# Altium PCB STM32F4Dash.PcbDoc
Units mm, origin at the board's own origin, x right, y up, seen from the top; angles counter-clockwise.
Board outline 91.33 x 91.05 mm, 2 copper layers (Top Layer, Bottom Layer); 42 components, 39 nets, 232 pads, 64 vias.
Unrouted connection lines stored in the file: 1.
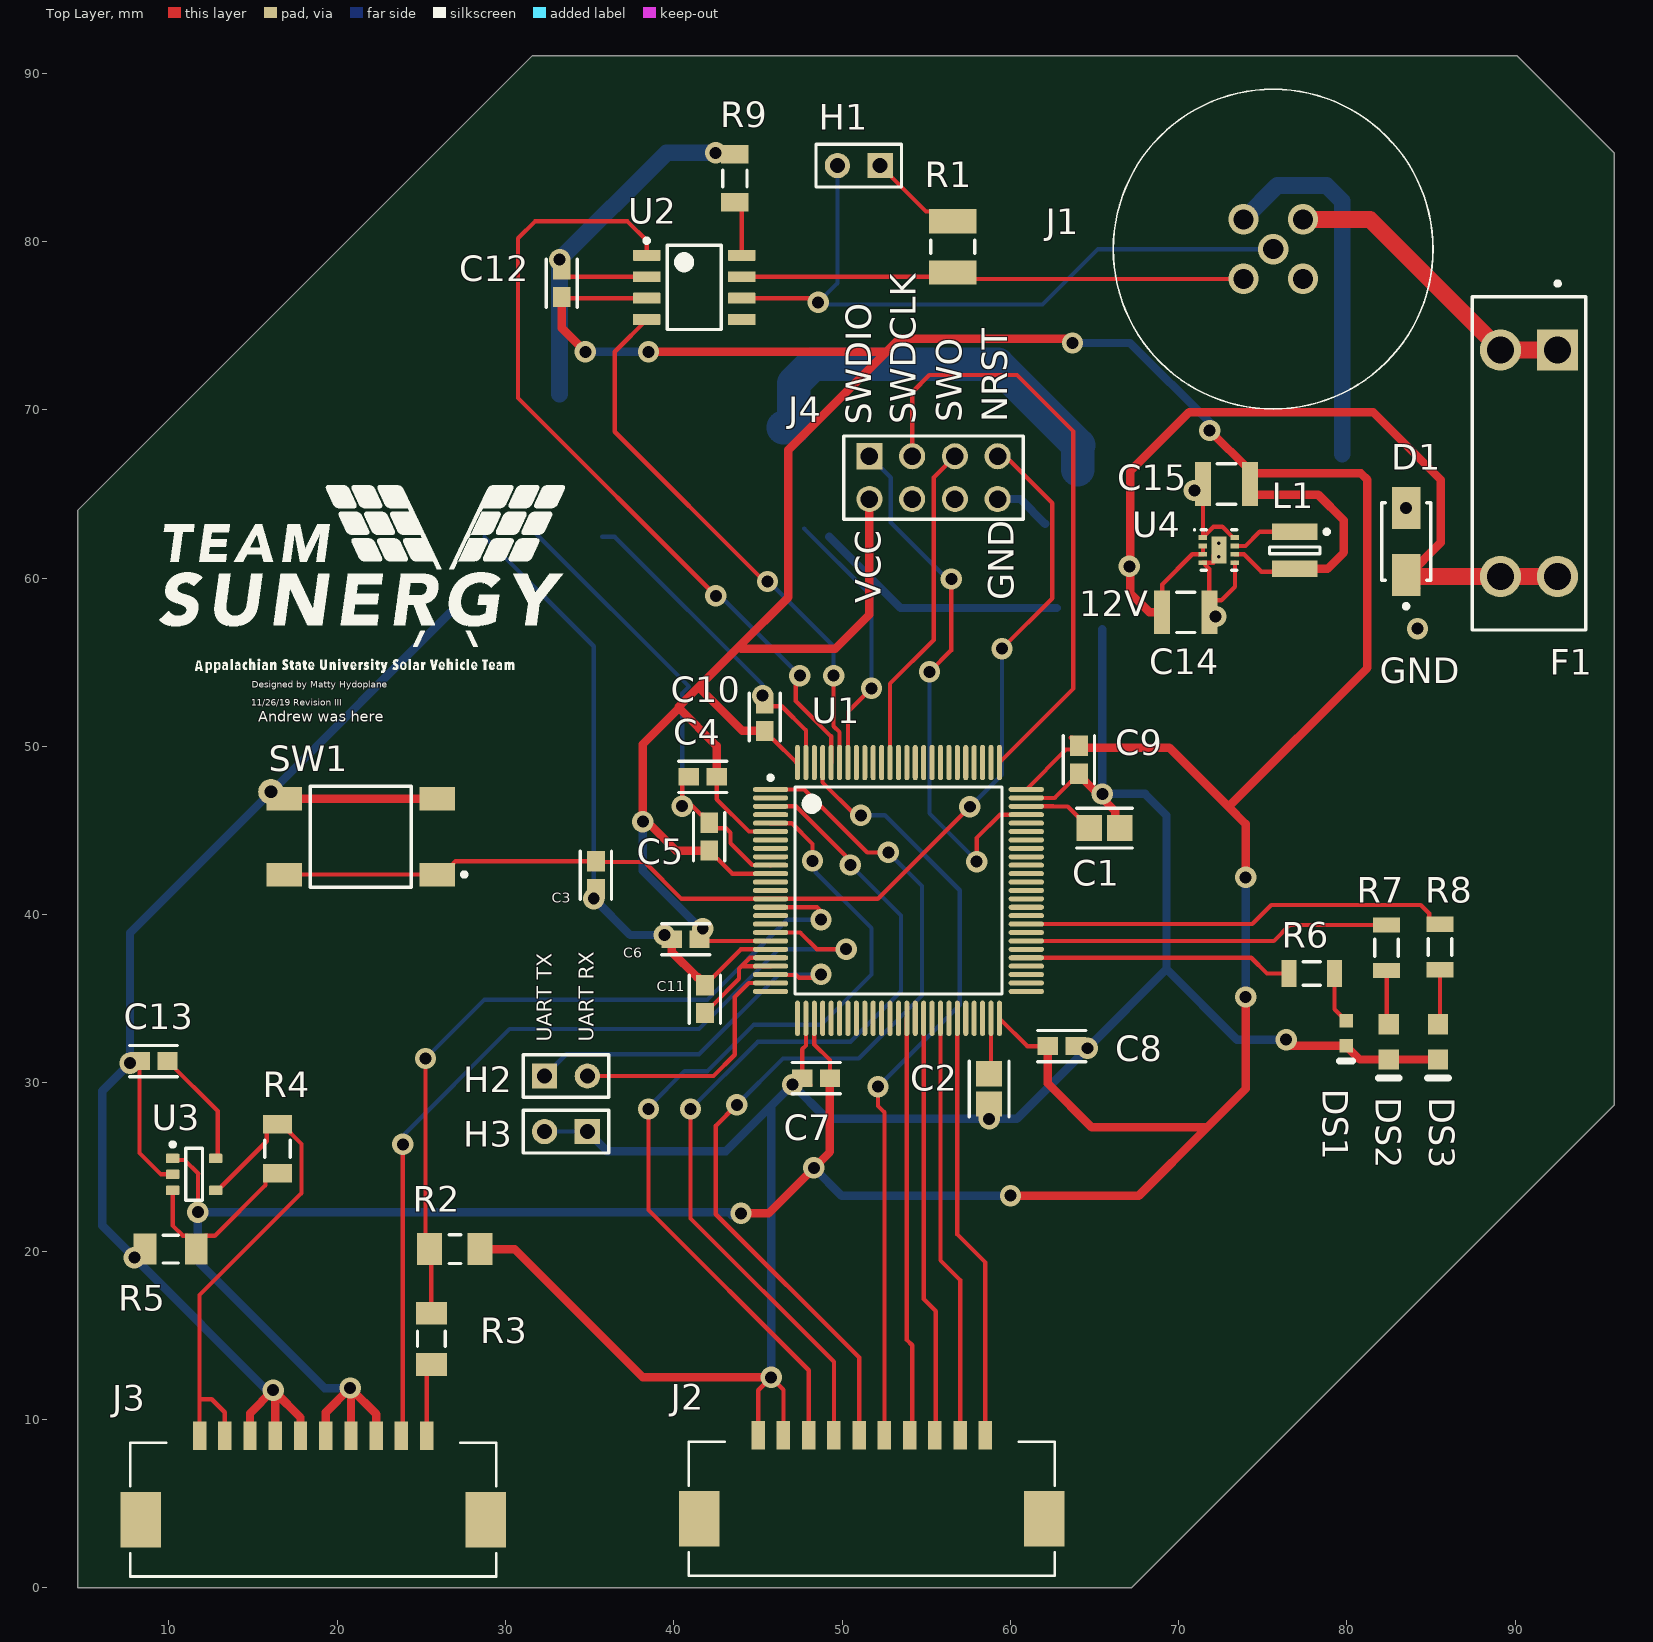
[diagram p0: Top Layer view]
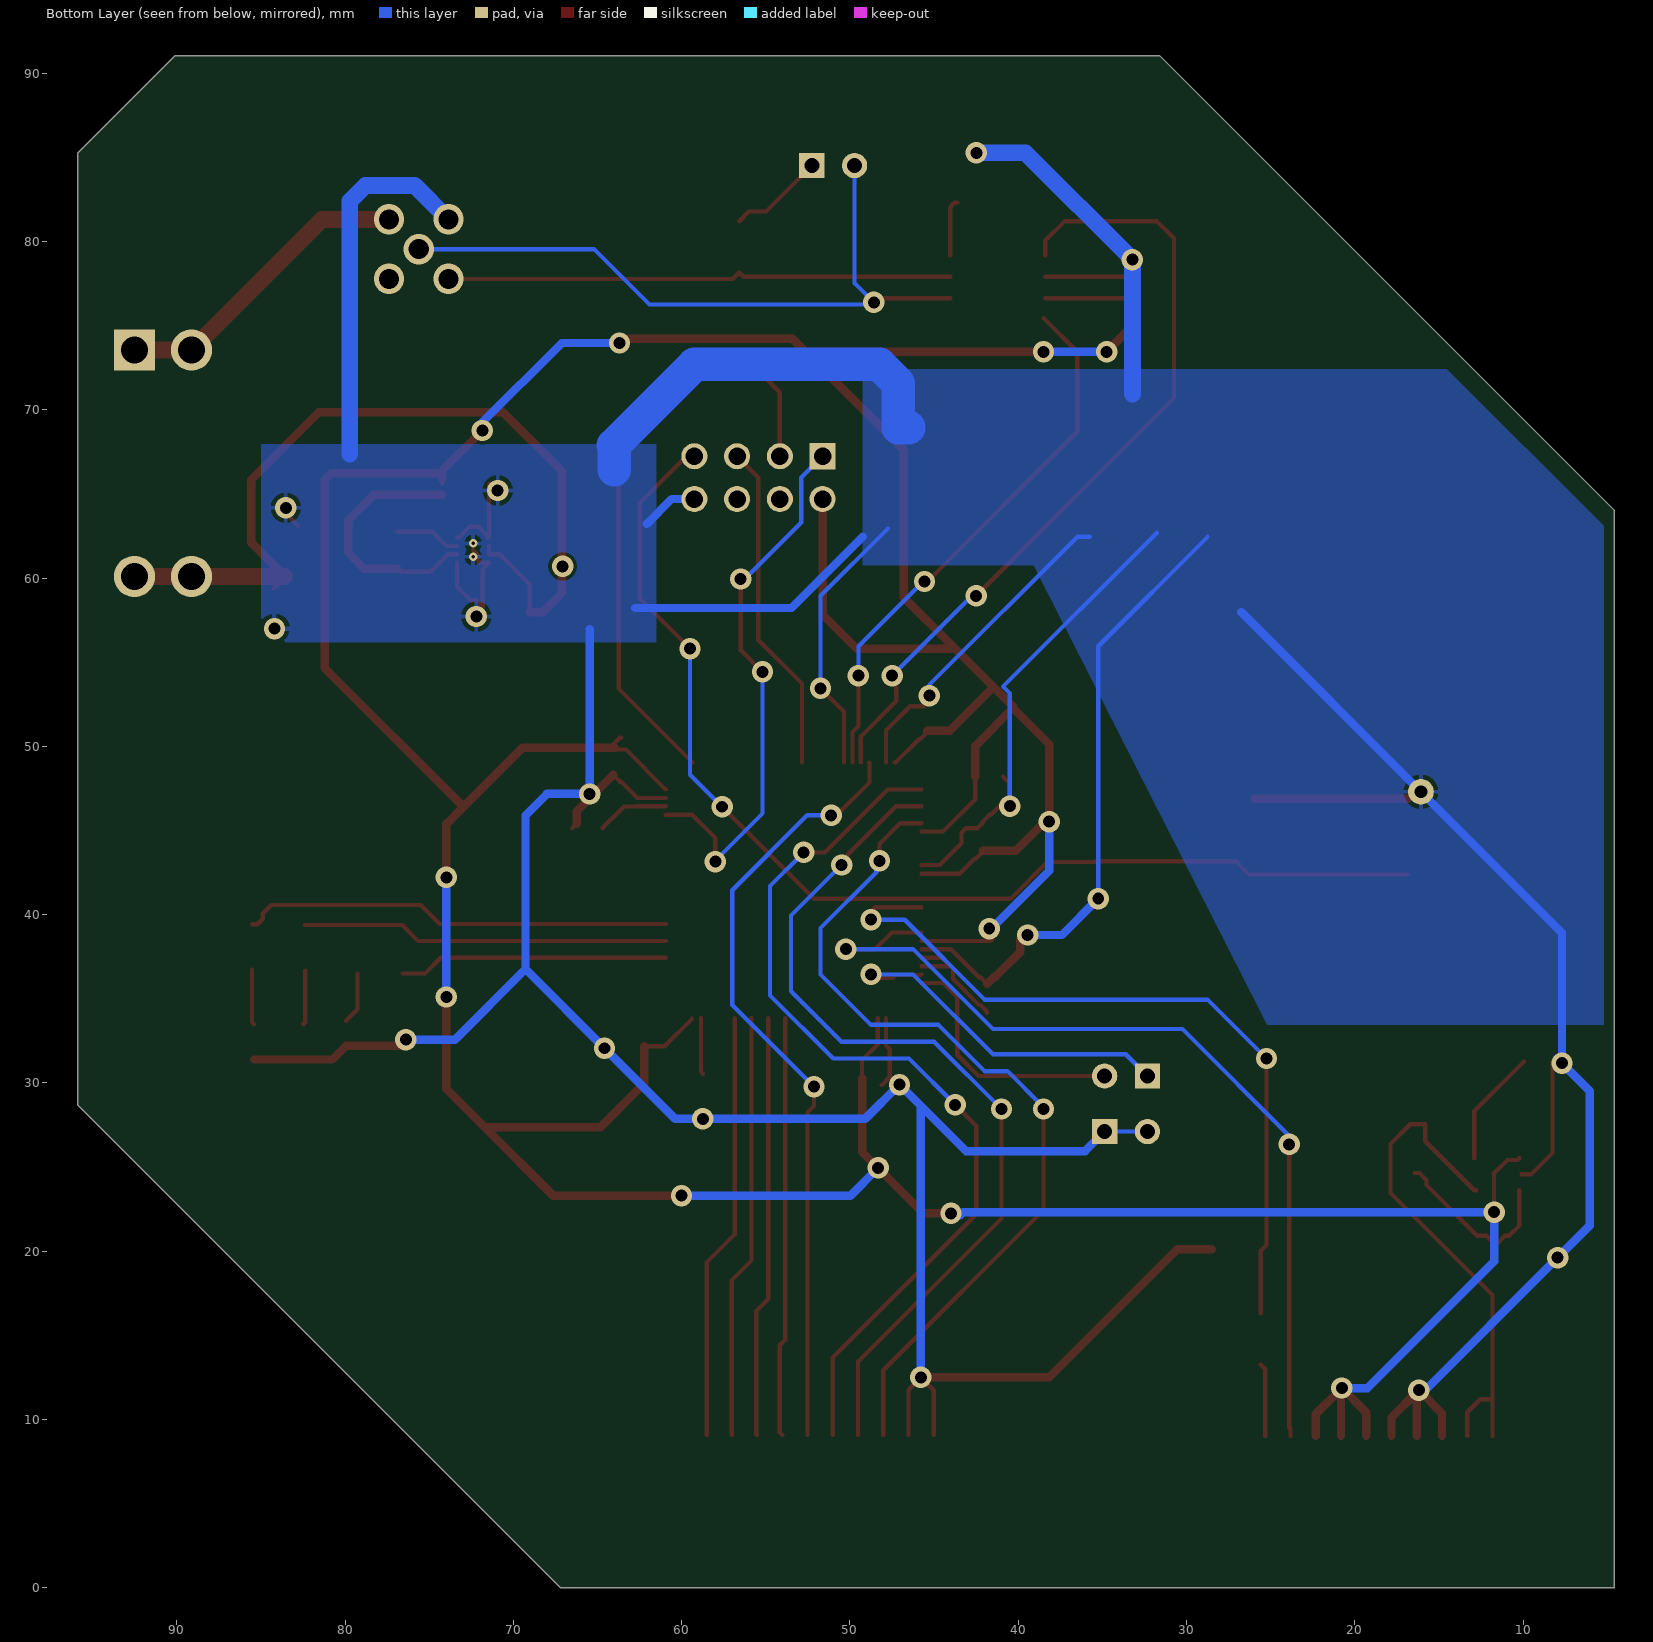
[diagram p1: Bottom Layer view, seen from below]

## Layer stack, top to bottom
Top Solder: solder mask 0.0102, Solder Resist, Dk 3.5
Top Layer: signal copper 0.0356
Dielectric 1: dielectric 0.32, FR-4, Dk 4.8
Bottom Layer: signal copper 0.0356
Bottom Solder: solder mask 0.0102, Solder Resist, Dk 3.5

## Board outline
4.575,0 67.2,0 95.9,28.7 95.9,85.25 90.1,91.05 31.6,91.05 4.575,64.025

## Design rules (kind name [scope] priority, off if disabled: settings)
Clearance [All] p1: gap=0.2 ignorepadtopadclearanceinfootprint=FALSE except(0: Arc-Hole Track-Hole SMDPad-Hole THPad-Hole Via-Hole Fill-Hole Poly-Hole Region-Hole Text-Hole)
MinimumSolderMaskSliver MinimumSolderMaskSliver_1 [HasFootprint('DSG8-1600X900TP') vs HasFootprint('DSG8-1600X900TP')] p1: minsoldermaskwidth=0
MinimumSolderMaskSliver [All] p2: minsoldermaskwidth=0.254
PolygonConnect [All] p1: connectstyle=Relief reliefconductorwidth=0.254 reliefentries=4 polygonreliefangle="90 Angle" airgapwidth=0.254
RoutingVias [All] p1: holewidth=0.711 width=1.27 viastyle="Through Hole" minholewidth=0.711 minwidth=1.27 maxholewidth=0.711 maxwidth=1.27
SilkToSolderMaskClearance SilkToSolderMaskClearance_1 [HasFootprint('DSG8-1600X900TP') vs HasFootprint('DSG8-1600X900TP')] p1: minsilkscreentomaskgap=0 clearancetoexposedcopper=TRUE
SilkToSolderMaskClearance [IsPad] p2: minsilkscreentomaskgap=0.254 clearancetoexposedcopper=TRUE
SolderMaskExpansion [All] p1: expansion=0.102
Width Width_1 [InNetClass('Power')] p1: maxlimit=5 minlimit=0.254 preferedwidth=1 minimp=50.000000 maximp=50.000000 favimp=50.000000
Width [All] p2: maxlimit=2 minlimit=0.2 preferedwidth=0.254 toplayer_maxwidth=1.5 minimp=50.000000 maximp=50.000000 favimp=50.000000
28 further rules are at their usual default settings.

## Classes and differential pairs
net class Power: +12 GND
component class User_LEDs: DS1 DS2 DS3 R6 R7 R8
component class Power_Supply: C14 C15 L1 U4
component class MCU: C1 C2 C3 C4 C5 C6 C7 C8 C9 C10 C11 SW1 U1
component class IO: C13 J2 J3 R2 R3 R4 R5 U3
component class Communications: C12 D1 F1 H1 H2 H3 J1 J4 R1 R9 U2

## Components (designator, comment, footprint, x,y, rotation, side; value= is the part's Value field where it differs from the comment)
C1 "2.2uF" Yageo_CC0805-0.85_IPC_A 65.601,45.142 r180 top
C2 "2.2uF" Yageo_CC0805-0.85_IPC_A 58.743,29.648 r90 top
C3 "100nF" Kemet_C0603_IPC_A 35.375,42.348 r270 top
C4 "100nF" Kemet_C0603_IPC_A 41.725,48.19 r0 top
C5 "100nF" Kemet_C0603_IPC_A 42.106,44.634 r270 top
C6 "100nF" Kemet_C0603_IPC_A 40.709,38.538 r0 top
C7 "100nF" Kemet_C0603_IPC_A 48.456,30.283 r0 top
C8 "100nF" Kemet_C0603_IPC_A 63.061,32.188 r0 top
C9 "100nF" Kemet_C0603_IPC_A 64.077,49.206 r270 top
C10 "100nF" Kemet_C0603_IPC_A 45.408,51.746 r90 top
C11 "100nF" Kemet_C0603_IPC_A 41.852,34.982 r270 top
C12 "100nF" Kemet_C0603_IPC_A 33.343,77.527 r90 top
C13 "100nF" Kemet_C0603_IPC_A 9.086,31.299 r0 top
C14 "CAP 22uF 16V X7R 1210(3225)" CAPC1210(3225)280_L 70.427,57.969 r180 top value=22uF
C15 "CAP 22uF 16V X7R 1210(3225)" CAPC1210(3225)280_L 72.84,65.589 r0 top value=22uF
D1 "S1J-13-F" Diodes_SMA_0 83.525,62.175 r90 top
DS1 "HSMS-C190" AVAG-HSMX-C190_V 79.952,32.95 r270 top
DS2 "HSMD-C170" AVAG-HSMX-C170_V 82.492,32.442 r270 top
DS3 "HSMG-C170" AVAG-HSMX-C170_V 85.413,32.442 r270 top
F1 "3557-2" Keystone_3557-2_0 90.825,66.825 r270 top
H1 "Header 0" HDR1X2 52.266,84.512 r180 top
H2 "Header 0" HDR1X2 32.327,30.41 r0 top
H3 "Header 0" HDR1X2 34.867,27.108 r180 top
J1 "1542761" 1542761 75.624,79.549 r135 top
J2 "Part Number: 1-292227-0" CON10_1X10_DRH_H 58.52,9.074 r180 top value=Value
J3 "Part Number: 1-292227-0" CON10_1X10_DRH_H 25.321,9.025 r180 top value=Value
J4 "SSW-104-02-T-D" SMTC-SSW-104-02-X-D 51.63,67.24 r0 top
L1 "SRN3015-2R2M" BOUR-SRN3015-2_V 76.904,61.652 r270 top
R1 "ERJ-14YJ121U" RESC3225X70X50ML20T20 56.584,79.686 r90 top
R2 "ERA8AEB912V" RESC3216X70X50ML20T25 26.993,20.123 r180 top
R3 "4.7 kOhm" RESC3216X60X45ML15T20 25.596,14.789 r90 top
R4 "CRCW1206523RFKEA" RESC3216X60X45NL10T20 16.452,26.092 r270 top
R5 "CRCW12061K00FKEA" RESC3216X60X45ML15T20 10.102,20.123 r180 top
R6 "CRCW120656R0FKEA" RESC3216X60X45LL10T20 77.92,36.506 r180 top
R7 "CRCW120656R0FKEA" RESC3216X60X45LL10T20 82.365,38.03 r90 top
R8 "CRCW120656R0FKEA" RESC3216X60X45LL10T20 85.54,38.077 r90 top
R9 "ERJ-8GEYJ103V" RESC3216X70X50NL05T20 43.63,83.75 r90 top
SW1 "TL3301AF260QG" ESWI-TL3301AF260QG_V 21.405,44.634 r180 top
U1 "STM32F407VGT6" STM-LQFP100_M 53.354,41.439 r0 top
U2 "SN65HVD230D" D0008A_M 41.217,77.273 r0 top
U3 "LM321MFX" DBV0005A_L 11.499,24.568 r0 top
U4 "TPS62172DSGR" DSG8-1600X900TP 72.398,61.664 r0 top

## Footprints (in the part's own frame and the unit in brackets; to place one, negate y for a bottom-side part, rotate by r counter-clockwise, add the part's x,y. Pads: shape width x height; smd on the part's side, far side on the other; paste and mask are expansions set on the pad)
1542761 [mm]
  round 1.8 hole 1.2: 1(-2.5,0) 2(0,-2.5) 3(2.5,0) 4(0,2.5) 5(0,0)
  silkscreen extent -9.5,-9.5 9.5,9.5
AVAG-HSMX-C170_V [mm] "SMD, 2-Leads, Body 2x1.25mm, Height 0.8mm"
  rect 1.2x1.2 smd: 1(-1.05,0) 2(1.05,0)
  silkscreen extent 2.15,-0.63 2.15,0.63, body extent -1,-0.63 1,0.63, height 0.8
AVAG-HSMX-C190_V [mm] "SMD, 2-Leads, Body 1.6x0.8mm, Height 0.9mm"
  rect 0.8x0.8 smd: 1(-0.75,0) 2(0.75,0)
  silkscreen extent 1.65,-0.4 1.65,0.4, body extent -0.8,-0.4 0.8,0.4, height 0.9
BOUR-SRN3015-2_V [mm] "SMD, 2-Leads, Body 3x3mm, Height 1.5mm"
  rect 1x2.7 smd: 1(-1.1,0) 2(1.1,0)
  silkscreen extent -1.22,-1.5 0.2,2.03, body extent -1.5,-1.5 1.5,1.5, height 1.5
CAPC1210(3225)280_L [mm] "Chip Capacitor, Body 3.2x2.5mm, Height 2.8mm, IPC High Density"
  rect 0.95x2.6 smd: 1(-1.4,0) 2(1.4,0)
  silkscreen extent -0.55,-1.2 0.55,1.2, body extent -1.7,-1.4 1.7,1.4, height 2.8
CON10_1X10_DRH_H [mm]
  rect 0.8x1.7 smd: 1(0,0) 2(1.5,0) 3(3,0) 4(4.5,0) 5(6,0) 6(7.5,0) 7(9,0) 8(10.5,0) 9(12,0) 10(13.5,0)
  rect 2.413x3.302 smd: 11(-3.499,4.978) 12(16.999,4.978)
  silkscreen extent -4.12,0.41 17.62,8.36, body extent 0,0 0.25,0.25, height 0.25
D0008A_M [mm] "SOIC, 8-Leads, Body 5x4mm, Pitch 1.27mm, IPC Low Density"
  rrect15% 1.65x0.65 smd: 1(-2.825,1.905) 2(-2.825,0.635) 3(-2.825,-0.635) 4(-2.825,-1.905) 5(2.825,-1.905) 6(2.825,-0.635) 7(2.825,0.635) 8(2.825,1.905)
  silkscreen extent -2.95,-2.5 1.6,2.9, body extent -3,-2.45 3,2.45, height 1.63
DBV0005A_L [mm] "SOT23, 5-Leads, Body 3.05x1.75mm, Pitch 0.95mm, IPC High Density"
  rrect18% 0.8x0.55 smd: 1(-1.275,0.95) 2(-1.275,0) 3(-1.275,-0.95) 4(1.275,-0.95) 5(1.275,0.95)
  silkscreen extent -1.4,-1.55 0.5,1.9, body extent -1.42,-1.46 1.42,1.46, height 1.08
Diodes_SMA_0 [mm]
  rect 2.5x1.7 smd paste+0 mask+0: 1(-2,0) 2(2,0)
  silkscreen extent -3.97,-1.46 2.3,1.46, body extent -3.35,-1.56 3.35,1.56, height 0.25
DSG8-1600X900TP [mm] "SON, 8-Leads, Body 2x2mm, Pitch 0.5mm, Thermal Pad 1.6x0.9mm, TI Recommended"
  rect 0.5x0.28 smd paste-0.14 mask+0.07: 1(-0.95,0.75) 2(-0.95,0.25) 3(-0.95,-0.25) 4(-0.95,-0.75) 5(0.95,-0.75) 6(0.95,-0.25) 7(0.95,0.25) 8(0.95,0.75)
  rect 0.9x1.6 smd paste-0.45 mask+0.07: 9(0,0)
  silkscreen extent -1.5,-1.2 1.05,1.25, body extent -1.05,-1.05 1.05,1.05, height 0.8
ESWI-TL3301AF260QG_V [mm] "SMD, 4-Leads, Body 6x6mm"
  rect 2.1x1.4 smd: 1(-4.55,2.25) 2(4.55,2.25) 3(-4.55,-2.25) 4(4.55,-2.25)
  silkscreen extent -6.27,-3 3,3, body extent -3,-3 3,3, height 5.3
HDR1X2 [mm] "Connector; Header; 2 Position"
  rect 1.5x1.5 hole 0.9: 1(0,0)
  round 1.5 hole 0.9: 2(2.54,0)
  silkscreen extent -1.27,-1.27 3.81,1.27
Kemet_C0603_IPC_A [mm]
  rect 1.206x1.058 smd paste+0 mask+0: 1(-0.826,0) 2(0.826,0)
  silkscreen extent -1.43,-0.93 1.43,0.93
Keystone_3557-2_0 [mm]
  rect 2.45x2.45 hole 1.6 paste-1000 mask+0: 1(-6.735,1.7)
  round 2.45 hole 1.6 paste-1000 mask+0: 2(6.735,1.7) 3(-6.735,-1.7) 4(6.735,-1.7)
  silkscreen extent -10.8,-3.36 9.9,3.36, body extent -10.08,-3.54 10.08,3.54, height 0.25
RESC3216X60X45LL10T20 [mm] "Chip Resistor, 2-Leads, Body 3.20x1.60mm, IPC High Density"
  rect 0.9x1.6 smd: 1(-1.35,0) 2(1.35,0)
  silkscreen extent -0.5,-0.7 0.5,0.7, body extent -1.65,-0.85 1.65,0.85, height 0.6
RESC3216X60X45ML15T20 [mm] "Chip Resistor, 2-Leads, Body 3.3x1.75mm, IPC Low Density"
  rect 1.35x1.85 smd: 1(-1.525,0) 2(1.525,0)
  silkscreen extent -0.45,-0.82 0.45,0.82, body extent -1.65,-0.87 1.65,0.87, height 0.6
RESC3216X60X45NL10T20 [mm] "Chip Resistor, 2-Leads, Body 3.20x1.60mm, IPC Medium Density"
  rect 1.1x1.7 smd: 1(-1.45,0) 2(1.45,0)
  silkscreen extent -0.5,-0.75 0.5,0.75, body extent -1.65,-0.85 1.65,0.85, height 0.6
RESC3216X70X50ML20T25 [mm] "Chip Resistor, 2-Leads, Body 3.20x1.60mm, IPC Low Density"
  rect 1.5x1.9 smd: 1(-1.5,0) 2(1.5,0)
  silkscreen extent -0.35,-0.85 0.35,0.85, body extent -1.7,-0.9 1.7,0.9, height 0.7
RESC3216X70X50NL05T20 [mm] "Chip Resistor, 2-Leads, Body 3.20x1.60mm, IPC Medium Density"
  rect 1.1x1.65 smd: 1(-1.425,0) 2(1.425,0)
  silkscreen extent -0.5,-0.72 0.5,0.72, body extent -1.63,-0.82 1.62,0.82, height 0.7
RESC3225X70X50ML20T20 [mm] "Chip Resistor, 2-Leads, Body 3.20x2.50mm, IPC Low Density"
  rect 1.45x2.8 smd: 1(-1.525,0) 2(1.525,0)
  silkscreen extent -0.4,-1.3 0.4,1.3, body extent -1.7,-1.35 1.7,1.35, height 0.7
SMTC-SSW-104-02-X-D [mm] "SQ Post Socket, 2x4 Pins, Vertical, 2.54mm Pitch, Female"
  rect 1.55x1.55 hole 1.04: 1(0,0)
  round 1.55 hole 1.04: 2(0,-2.54) 3(2.54,0) 4(2.54,-2.54) 5(5.08,0) 6(5.08,-2.54) 7(7.62,0) 8(7.62,-2.54)
  silkscreen extent -1.53,-3.74 9.15,1.2, body extent -1.52,-3.75 9.14,1.21, height 8.51
STM-LQFP100_M [mm] "Thin QFP, 100-Leads, Body 14x14mm, Pitch 0.5mm, IPC Low Density"
  oval 2.1x0.3 smd: 1(-7.6,6) 2(-7.6,5.5) 3(-7.6,5) 4(-7.6,4.5) 5(-7.6,4) 6(-7.6,3.5) 7(-7.6,3) 8(-7.6,2.5) 9(-7.6,2) 10(-7.6,1.5) 11(-7.6,1) 12(-7.6,0.5) 13(-7.6,0) 14(-7.6,-0.5) 15(-7.6,-1) 16(-7.6,-1.5) 17(-7.6,-2) 18(-7.6,-2.5) 19(-7.6,-3) 20(-7.6,-3.5) 21(-7.6,-4) 22(-7.6,-4.5) 23(-7.6,-5) 24(-7.6,-5.5) 25(-7.6,-6) 51(7.6,-6) 52(7.6,-5.5) 53(7.6,-5) 54(7.6,-4.5) 55(7.6,-4) 56(7.6,-3.5) 57(7.6,-3) 58(7.6,-2.5) 59(7.6,-2) 60(7.6,-1.5) 61(7.6,-1) 62(7.6,-0.5) 63(7.6,0) 64(7.6,0.5) 65(7.6,1) 66(7.6,1.5) 67(7.6,2) 68(7.6,2.5) 69(7.6,3) 70(7.6,3.5) 71(7.6,4) 72(7.6,4.5) 73(7.6,5) 74(7.6,5.5) 75(7.6,6)
  oval 0.3x2.1 smd: 26(-6,-7.6) 27(-5.5,-7.6) 28(-5,-7.6) 29(-4.5,-7.6) 30(-4,-7.6) 31(-3.5,-7.6) 32(-3,-7.6) 33(-2.5,-7.6) 34(-2,-7.6) 35(-1.5,-7.6) 36(-1,-7.6) 37(-0.5,-7.6) 38(0,-7.6) 39(0.5,-7.6) 40(1,-7.6) 41(1.5,-7.6) 42(2,-7.6) 43(2.5,-7.6) 44(3,-7.6) 45(3.5,-7.6) 46(4,-7.6) 47(4.5,-7.6) 48(5,-7.6) 49(5.5,-7.6) 50(6,-7.6) 76(6,7.6) 77(5.5,7.6) 78(5,7.6) 79(4.5,7.6) 80(4,7.6) 81(3.5,7.6) 82(3,7.6) 83(2.5,7.6) 84(2,7.6) 85(1.5,7.6) 86(1,7.6) 87(0.5,7.6) 88(0,7.6) 89(-0.5,7.6) 90(-1,7.6) 91(-1.5,7.6) 92(-2,7.6) 93(-2.5,7.6) 94(-3,7.6) 95(-3.5,7.6) 96(-4,7.6) 97(-4.5,7.6) 98(-5,7.6) 99(-5.5,7.6) 100(-6,7.6)
  silkscreen extent -7.72,-6.15 6.15,6.82, body extent -7,-7 7,7, height 1.6
Yageo_CC0805-0.85_IPC_A [mm]
  rect 1.505x1.556 smd paste+0 mask+0: 1(-0.901,0) 2(0.901,0)
  silkscreen extent -1.65,-1.18 1.65,1.18, body extent -2.15,-1.28 2.15,1.28, height 0.25

## Part data
C1 C2: library part CC0805KKX7R6BB225, "2.2UF CC0805KKX7R6BB225"
C3 C4 C5 C6 C7 C8 C9 C10 C11 C12 C13: library part C0603C104K5RACTU, "CAP CER 0.1UF 100NF 50V X7R 0603 C0603C104K5RACTU"
C14 C15: library part CMP-1038-02277-1, "CAP 22uF 16V ±10% 1210 (3225 Metric) Thickness 2.8mm SMD", Case-EIA=1210, Case-Metric=3225, Rated Voltage="16 V", Tolerance=±10%, Max Thickness="2.8 mm", Technology=SMT
DS1: library part CMP-2000-06427-1, "LED Uni-Color Red, 52 mW, 20 mA, -40 to 85 degC, 2-Pin SMD, RoHS, Tape and Reel", Emitting Color=Red, Forward Current=25mA, Forward Voltage=2.6V, Manufacturer=Avago, Operating Temperature Classification=Industrial, Operating Temp Range=-40Cto85C, Package Description="2-Pin Surface Mount Device, Body 1.6 x 0.8 mm, Height 0.9 mm", Package Reference=HSMX-C190, Package Type=ChipLed, Power Dissipation=52W, Reverse Voltage=5V, Test Current (It)=20mA, Chip Material=GaP, Datasheet URL=http://docs.avagotech.com/docs/AV02-0551EN, Datasheet Version=03/2012, DELETED=Compliant, Dominant Wave Length=626nm, High Brightness=No, Lens Dimensions=1x0.8x0.5mm, Lens Type=ColorlessDiffused, Luminous Intensity=10mcd, Lum Intensity=10mcd, Main Category=ChipLED, Manufacturer URL=http://www.avagotech.com/, Mounting=SurfaceMount, Mounting Technology=SurfaceMount, Number of  Elements=1, Packaging=TapeandReel, Peak Wavelength=630nm, Pin Count=2, Product Depth (mm)=0.8mm, Product Height (mm)=0.8mm, Product Length (mm)=1.6mm, Rad Hardened=No, Shape Type=Rectangular, Type=Uni-Color, Viewing Angle=170deg
DS2: library part CMP-2000-06421-1, "LED Uni-Color Orange, 52 mW, 20 mA, -40 to 85 degC, 2-Pin SMD, RoHS, Tape and Reel", Forward Current If=20mA, Forward Voltage=2.2V, LED Colour=Orange, Manufacturer=Avago, Operating Temperature Max=85°C, Operating Temperature Min=-30°C, Operating Temperature Range=-30°Cto+85°C, Opto Case Style=SMD, Package Description="2-Pin Surface Mount Device, Body 2 x 1.25 mm, Height 0.8 mm", Package Reference=HSMX-C170, Power Dissipation Pd=52mW, Storage Temperature Min=-40°C, Bulb Size=1.25mmx1.4mm, Datasheet URL=http://docs.avagotech.com/docs/AV02-0551EN, Datasheet Version=03/2012, Dominant Wavelength=604nm, External Depth=0.8mm, External Length / Height=2mm, External Width=1.25mm, Forward Current If Max=20mA, Forward Voltage VF Max=2.2V, LED Mounting=SMD, LED Type=Standard, Lens Shape=Rectangular, Light Area Height=1.25mm, Luminous Intensity=8mcd, Luminous Intensity Typ=8mcd, Manufacturer URL=http://www.avagotech.com/, Mounting Technology=SurfaceMount, Mounting Type=SMD, MSL=MSL2A-4weeks, No. of Pins=2, Opto Mounting Orientation=Top, Package / Case=SMD, Peak Forward Current=20mA, Peak Wavelength=605nm, PIV Max=5V, Storage Temperature Max=85°C, SVHC=NoSVHC(19-Dec-2012), Viewing Angle=170°, Voltage Vf Typ=2.2V, Wavelength Typ=605nm
DS3: library part CMP-2000-05062-1, "Chip LED, Green, 2.2 V, -40 to 85 degC, 2-Pin SMD, Pb-Free, Tape and Reel", Forward Current If=20mA, Forward Voltage=2.2V, Forward Voltage VF Max=2.6V, LED Colour=Green, Manufacturer=Avago, Operating Temperature Max=85degC, Operating Temperature Min=-30degC, Operating Temperature Range=-30degCto+85degC, Opto Case Style=SMD, Package Description="2-Pin Surface Mount Device, Body 2 x 1.25 mm, Height 0.8 mm", Package Reference=HSMX-C170, Storage Temperature Min=-40degC, Bulb Size=1.25mmx1.4mm, Datasheet URL=https://datasheet.ciiva.com/29280/180495-da-01-en-chip-led-hsmg-c170-gelb-gruen-29280971.pdf, Datasheet Version=Oct-08, Dominant Wavelength=572nm, Dominant Wavelength Typ=572nm, External Depth=0.8mm, External Length / Height=2mm, External Width=1.25mm, Forward Current If Max=20mA, LED Mounting=SMD, LED Type=Standard, Lens Shape=Rectangular, Light Area Height=1mm, Luminous Intensity=15mcd, Luminous Intensity Min=4mcd, Luminous Intensity Typ=15mcd, Manufacturer URL=http://www.avagotech.com/, Mounting Type=SMD, MSL=MSL2A-4weeks, No. of Pins=2, Opto Mounting Orientation=Top, Packaging=CutTape, Peak Forward Current=20mA, Peak Wavelength=570nm, PIV Max=5V, Storage Temperature Max=85degC, SVHC=NoSVHC(16-Jun-2014), Viewing Angle=170deg, Voltage Vf Typ=2.2V, Wavelength Typ=570nm
H1 H2 H3: library part "Header 2", "Header, 2-Pin", LatestRevisionDate=17-Jul-2002, LatestRevisionNote="Re-released for DXP Platform.", Publisher="Altium Limited"
J1: "Connector", Manufacturer_Name="Phoenix Contact", Mouser Part Number=651-1542761, RS Part Number=8025583, Allied_Number=70170366, Allied Price/Stock=https://www.alliedelec.com/phoenixcontact-1542761/70170366/, Datasheet Link=https://media.digikey.com/PDF/Data%20Sheets/Phoenix%20Contact%20PDFs/1542761.pdf, Height=18mm, Manufacturer_Part_Number=1542761, Mouser Price/Stock=https://www.mouser.com/Search/Refine.aspx?Keyword=651-1542761, RS Price/Stock=http://uk.rs-online.com/web/p/products/8025583
J2 J3: library part 1-292227-0, "No Description Available", Built_By=EMA_UL_Team, Copyright="Copyright (C) 2018 Accelerated Designs. All rights reserved", Manufacturer_Part_Number=1-292227-0, RefDes=RefDes, Type=DEV, Vendor="TE Connectivity"
J4: library part CMP-1023-00342-1, "SQ Post Socket, Through-hole, Vertical, -55 to 105 degC, 2.54mm Pitch, 8-Pin, Female, RoHS", Manufacturer=Samtec, Temperature Range="-55 to 105 degC", ComponentLink1Description="Manufacturer URL", ComponentLink1URL=http://www.samtec.com, ComponentLink2Description=Datasheet, ComponentLink2URL=http://www.samtec.com/documents/webfiles/pdf/SSW_TH.PDF, ComponentLink3Description="Package Specification", ComponentLink3URL=http://www.samtec.com/documents/webfiles/cpdf/SSW-1XX-XX-XXX-X-XX-XXX-XX-MKT.pdf, DatasheetVersion=F-214, Mounting Technology=Through-hole, Orientation=Vertical, PackageDescription="Assembly, Socket Strip .016 X .031 Tail", PackageReference=SSW-104-02-X-D, PackageVersion="CA, 6/1987", PartNumber=SSW-104-02-T-D, Pitch="2.54 mm", RoHS=True
L1: library part CMP-0007-00003-1, "Semi-shielded Power Inductor, 2.2 uH, +/- 20%, 1.8 A, -40 to 125 degC, 3 x 3 x 1.5 mm SMD, RoHS and Halogen Free, Tape and Reel", Inductance="2.2 uH", Inductance tolerance="+/- 20%", Manufacturer=Bourns, Operating Temperature="-40 to 125 degC", Rated Current="1.8 A", Resistance to Solder Heat="+260 degC for 10 sec.", ComponentLink1Description="Manufacturer URL", ComponentLink1URL=http://www.bourns.com/, ComponentLink2Description=Datasheet, ComponentLink2URL=http://www.bourns.com/data/global/pdfs/SRN3015.pdf, ComponentLink3Description="Package Specification", ComponentLink3URL=http://www.bourns.com/data/global/pdfs/SRN3015.pdf, DatasheetVersion=Aug-11, DCR Max="0.072 Ohm", Isat="1.65 A", Mounting Technology="Surface Mount", PackageDescription="2-Pin SMD, Body 3 x 3 mm, Height 1.5 mm", PackageReference=SRN3015, Packing="Tape and Reel", PartNumber=SRN3015-2R2M, RoHS=TRUE, SRF Min="90 MHz"
R1: library part CMP-2005-03490-1, "120Ohm", Manufacturer=Panasonic, Part Number=ERJ-14YJ121U
R2: library part CMP-2003-00013-1, Manufacturer=Panasonic, Part Number=ERA8AEB912V
R3: library part CMP-2100-03618-1, "Chip Resistor, 4.7 KOhm, +/- 1%, 0.25 W, -55 to 155 degC, 1206 (3216 Metric), RoHS, Tape and Reel", Case/Package=1206, Case Code (Metric)=3216, Manufacturer="Vishay Semiconductor", Max Operating Temperature=155degC, Max Power Dissipation=250mW, Min Operating Temperature=-55degC, Package Description="2-Pin Surface Mount Device, Body 3.15 x 1.6 mm", Package Quantity=10, Package Reference=1206.0, Resistance=4.7KOhm, Temperature Coefficient=100ppm/degreesC, Tolerance=1%, Voltage Rating=200V, Case Code (Imperial)=1206, Composition=ThickFilm, Contact Plating=Tin, Datasheet URL=http://www.vishay.com/docs/20035/dcrcwe3.pdf, Datasheet Version=41061.0, Depth=1.6mm, Height=0.55mm, Lead Free=LeadFree, Length=3.2mm, Manufacturer URL=http://www.vishay.com/, Military Standard=Not, Mount=SurfaceMount, Number of Terminations=2, Packaging=TapeandReel, Power Rating=250mW, Radiation Hardening=No, REACH SVHC=Unknown, RoHSCompliant=true, Termination=SMD/SMT, Voltage Rating (DC)=200V, Weight=0.000353oz, Width=1.6mm
R4: library part CMP-2003-02266-1, Manufacturer="Vishay Dale", Part Number=CRCW1206523RFKEA
R5: library part CMP-2100-03616-1, "Chip Resistor, 1 KOhm, +/- 1%, 0.25 W, -55 to 155 degC, 1206 (3216 Metric), RoHS, Tape and Reel", Case/Package=1206, Case Code (Metric)=3216, Manufacturer="Vishay Semiconductor", Max Operating Temperature=155degC, Max Power Dissipation=250mW, Min Operating Temperature=-55degC, Package Description="2-Pin Surface Mount Device, Body 3.15 x 1.6 mm", Package Quantity=10, Package Reference=1206.0, Resistance=1KOhm, Temperature Coefficient=100ppm/degreesC, Tolerance=1%, Voltage Rating=200V, Case Code (Imperial)=1206, Composition=ThickFilm, Contact Plating=Tin, Datasheet URL=http://www.farnell.com/datasheets/1720486.pdf, Datasheet Version=41061.0, Depth=1.6mm, Height=0.55mm, Lead Free=LeadFree, Length=3.2mm, Manufacturer URL=http://www.vishay.com/, Military Standard=Not, Mount=SurfaceMount, Number of Pins=2, Number of Terminations=2, Packaging=TapeandReel, Power Rating=250mW, Radiation Hardening=No, REACH SVHC=Unknown, RoHSCompliant=true, Termination=SMD/SMT, Voltage Rating (DC)=200V, Weight=0.000353oz, Width=0.063inch
R6 R7 R8: library part CMP-2003-02285-1, Manufacturer="Vishay Dale", Part Number=CRCW120656R0FKEA
R9: library part CMP-2003-00545-1, "10k", Manufacturer=Panasonic, Part Number=ERJ-8GEYJ103V
SW1: library part CMP-2000-07249-1, "Tactile Switch, SPST-NO, 50 mA, 12 V, -20 to 70 degC, 4-Pin SMD, RoHS, Tape and Reel", Contact Rating @ Voltage=0.05A@12VDC, Illumination Type, Color=-, Manufacturer=E-Switch, Operating Force=260gf, Operating Temperature=-20°C~70°C, Package Description="4-Pin Surface Mount Device, Body 6 x 6 mm", Package Version="Rev. D, 10/2014", Standard Package=1, 3D Model=TL3301AFyyyyG.stp, Actuator Height off PCB, from Pins=5.00mm, Actuator Material=Polyamide(PA),Nylon, Actuator Orientation=TopActuated, Actuator Type=Standard, Catalog Drawings=TL3301xFFootprint, Category=Switches, Circuit=SPST-NO, Datasheet URL=https://www.e-switch.com/system/asset/product_line/data_sheet/185/TL3301.pdf, Datasheet Version=12/2013, Family=TactileSwitches, Featured Product=TL3301SeriesTactSwitch, Features=-, Illumination=Non-Illuminated, Illumination Voltage (Nominal)=-, Ingress Protection=-, Manufacturer URL=http://www.e-switch.ch/en/, Mechanical Life=100,000Cycles, Mounting Technology=SurfaceMount, Mounting Type=SurfaceMount, Online Catalog=TL3301Series, Other Names=EG2527DKR, Outline=6.00mmx6.00mm, Package Reference=TL3301AF260QG, Package URL=http://spec_sheets.e-switch.com/specs/P010513.pdf, Packaging=Digi-Reel®, Product Training Modules=SwitchBasics, RoHS Information=TL3301SeriesRoHSCertofCompliance, Series=TL3301, Switch Function=Off-Mom, Switch Travel=0.25mm, Termination Style=GullWing
U1: library part CMP-0243-00017-3, "ARM Cortex-M4 32-bit MCU+FPU, 210 DMIPS, 1024 kB Flash, 192 kB Internal RAM, 82 I/Os, 100-pin LQFP, -40 to 85 degC, Tray", I/Os (High Current)=82, Manufacturer=STMicroelectronics, Operating Frequency(F) (Processor speed) (MHz)=168, Supply Voltage(Vcc) max (V)=3.6, Supply Voltage(Vcc) min (V)=1.8, ComponentLink1Description="Manufacturer URL", ComponentLink1URL=http://www.st.com/web/en/home.html, ComponentLink2Description=Datasheet, ComponentLink2URL=http://www.st.com/st-web-ui/static/active/en/resource/technical/document/datasheet/DM00037051.pdf, ComponentLink3Description="Package Specification", ComponentLink3URL=http://www.st.com/st-web-ui/static/active/en/resource/technical/document/data_brief/DM00071938.pdf, Core="ARM Cortex-M4", D/A Converter=2x12-bit, DatasheetVersion="Rev. 4", FLASH Size (Prog) (kB)=1024, Internal RAM Size (kB)=192, Mounting Technology="Surface Mount", PackageDescription="100-Pin Low Profile Quad Flat Package, 14 x 14 mm Body, 0.5 mm Pitch", PackageReference=LQFP100, PackageVersion="Rev. 1, 06/2013", Packing=Tray, PartNumber=STM32F407VGT6
U2: library part CMP-0315-00046-3, "CAN Bus Transceiver, 3.3 V, -40 to 85 degC, 8-Pin SOIC (D), Green (RoHS & no Sb/Br), Tube", Generic Part Number=SN65HVD230, Supply Voltage Max="3.6 V", Supply Voltage Min="3 V", Temperature Max="85 degC", Temperature Min="-40 degC", ComponentLink1Description="Manufacturer URL", ComponentLink1URL=http://www.ti.com/, ComponentLink2Description=Datasheet, ComponentLink2URL="http://www.ti.com/general/docs/lit/getliterature.tsp?genericGeneric Part Number=SN65HVD230&fileType=pdf", DatasheetVersion=SLOS346N, Mounting Technology="Surface Mount", PackageDescription="8-Pin Plastic Small Outline, Body 4.9 x 3.9 mm, Pitch 1.27 mm", Packing=Tube, PartNumber=SN65HVD230D, RoHS=TRUE
U3: library part CMP-0055-01337-3, "Low Power Single Op Amp, 5-pin SOT-23", Manufacturer="Texas Instruments", Package Reference=DBV0005A, PackageTopMarking=A63A*XTT, PowerWise=N, ComponentLink1Description="Datasheet URL", ComponentLink1URL=http://www.ti.com/general/docs/lit/getliterature.tsp?genericPartNumber=LM321&fileType=pdf, CompType=Amplifiers, PackageDescription="Molded SOT-23, .115 x .063 x .040 in Body, 5 Lead, .0375 in Pitch", PinCount=5, RoHS=N
U4: "Buck Step Down Regulator with 3 to 17 V Input and 3.3 V Output, -40 to 85 degC, 8-Pin WSON (DSG), Green (RoHS & no Sb/Br)", Manufacturer="Texas Instruments", Rating=Catalog, Switch Current Limit(Typ)(A)=1.05, Code_JEDEC=MO-229, ComponentLink1Description=Datasheet, ComponentLink1URL=http://www.ti.com/general/docs/lit/getliterature.tsp?genericPartNumber=TPS62172&fileType=pdf, ComponentLink2Description="Package Specification", ComponentLink2URL=http://www.ti.com/litv/pdf/mpds308a, ComponentLink3Description="URL Link1", ComponentLink3URL="Samples URL:http://www.ti.com/product/tps62172#samples", DatasheetVersion=SLVSAT8A, Duty Cycle(Max)(%)=100, Eco-Plan="Green (RoHS & no Sb/Br)", Iout(Max)(A)=0.5, Iq(Typ)(mA)=0.017, Mounting Technology="Surface Mount", PackageDescription="8-Pin Plastic Small Outline No-Lead, 2 x 2 x 0.8 mm Body, 0.5 mm Pitch, Exposed Pad", PackageReference=DSG8-1600X900TP, PackageVersion="revB, Oct-2010", PartNumber=TPS62172DSGR, Preset Vout(V)=3.3, Regulated Outputs(#)=1, SubFamily="Step-Down Regulator", Synchronous Rectification=TRUE, Topology=Buck, Vin(Max)(V)=17, Vin(Min)(V)=3, Vout(Max)(V)=3.3, Vout(Min)(V)=3.3

## Free pads (board coordinates)
  round 1.524 hole 0.762: 2(16.071,47.301)

## Via types
v1: diameter 1.27, hole 0.711, Top Layer to Bottom Layer, 57 vias
v2: diameter 1.8, hole 1.2, Top Layer to Bottom Layer, 5 vias
v3: diameter 0.5, hole 0.2, Top Layer to Bottom Layer, 2 vias

## Nets (pads, with @x,y where several pads share a name; then routed paths per layer and width w, separated by ;. In a path a pad name is that pad's centre, name@x,y a point inside that pad or via, vN(x,y) a via of type N, cw(c..) or ccw(c..) an arc to the next point about the centre after c; other vN are vias at no path point)
+12: C14.2 D1.1 F1.2 F1.4 U4.2 U4.3 | length 53.3
  Top Layer w0.254: C14.2 69.027,59.624 70.817,61.414 U4.3 ; U4.3@71.448,61.435 U4.2 ; D1.1@83.61,60.09 83.588,60.113 D1.1 83.525,60.124 83.562,60.087 D1.1@84.248,59.401
  Top Layer w0.5: C14.2 68.268,57.969 67.125,59.112 67.125,66.35 70.635,69.86 81.565,69.86 85.575,65.85 85.575,62.1 83.588,60.113 83.562,60.087 D1.1@83.475,60
  Top Layer w1: D1.1@83.61,60.09 F1.4 F1.2
  other v1: 67.075,60.7
GND: C1.1 C2.1 C3.2 C4.1 C5.1 C6.1 C7.1 C8.2 C9.2 C10.2 C11.1 C12.2 C13.1 C14.1 C15.1 D1.2 DS1.2 DS2.2 DS3.2 H3.1 H3.2 J1.3 J2.9 J2.10 J3.6 J3.7 J3.8 J4.8 pad.2 R2.1 R5.2 R9.2 SW1.3 SW1.4 U1.10 U1.20 U1.27 U1.74 U1.94 U1.99 U2.2 U3.2 U4.1 U4.4 U4.5 U4.8 U4.9 | length 434.9
  Top Layer w0.254: C13.1 8.26,25.84 9.532,24.568 U3.2@10.099,24.568 ; v1(16.198,11.741) v1@16.321,11.618 ; C12.2 33.343,78.31 33.745,77.908 U2.2 ; C4.1 40.5,47.791 v1(40.5,46.45) 40.616,46.45 40.866,46.7 41.63,45.936 41.704,45.936 42.106,45.534 C5.1 42.424,45.142 43.1,45.142 43.376,44.866 43.376,44.242 44.671,42.948 45.745,42.948 U1.10 ; C11.1@41.376,36.284 C11.1@41.45,36.284 ; C11.1 41.852,35.882 42.254,36.284 42.328,36.284 43.983,37.939 U1.20 ; J2.10 45.02,11.734 v1(45.789,12.503) 46.52,11.772 J2.9 ; C10.2 45.599,52.381 46.424,52.381 47.854,50.951 U1.99 ; U1.27 47.854,32.221 47.63,31.997 C7.1 47.704,30.283 C7.1@48.106,29.881 ; U1.94 50.354,52.054 v1(51.75,53.45) ; U1.74 62.636,46.939 63.601,47.904 63.675,47.904 C9.2@64.077,48.306 ; C1.1@66.231,45.413 C1.1 ; C15.1 71.448,65.581 U4.1 71.558,62.414 71.571,62.427 71.571,62.537 72.083,63.049 72.603,63.049 73.238,62.414 U4.8 ; U4.4 U4.4@71.558,60.914 ; U4.9 72.079,61.345 72.079,60.914 U4.4@71.558,60.914 ; U4.5 73.348,59.49 72.534,58.676 72.175,58.676 71.827,58.328 71.827,60.535 71.571,60.791 71.571,60.901 U4.4@71.558,60.914 ; v2(73.856,81.317) J1.3@74.274,81.317 ; v1@76.291,32.2 75.922,32.569 v1(76.396,32.569) ; D1.2@82.802,63.11 83.525,63.833 v1(83.525,64.175)
  Top Layer w0.5: J3.8 14.821,10.364 v1(16.198,11.741) ; J3.7 16.321,11.618 17.821,10.118 J3.6 ; SW1.4 SW1.3 ; R2.1 30.549,20.123 38.169,12.503 v1(45.789,12.503) ; C6.1 39.883,37.777 C11.1@41.376,36.284 ; C11.1@41.45,36.284 C11.1@41.852,35.882 ; C9.2@64.077,48.306 66.231,46.152 C1.1@66.231,45.413 ; v1@76.291,32.2 DS1.2 80.76,31.392 DS2.2 DS3.2
  Bottom Layer w0.254: 28.75,62.45 35.248,55.952 v1(35.248,40.951) ; 31.75,62.7 40.899,53.551 40.5,53.152 v1(40.5,46.45) ; H3.2 H3.1 ; 35.75,62.45 36.5,62.45 45.281,53.669 v1(45.281,53.016) ; 47.75,62.95 51.75,58.95 v1(51.75,53.45)
  Bottom Layer w0.5: v1@16.007,11.551 v1(7.943,19.615) 6.038,21.52 6.038,29.521 v1(7.689,31.172) 7.689,38.919 pad.2 26.75,57.98 ; H3.1 36.025,25.95 43.107,25.95 45.789,28.632 ; v1(35.248,40.951) 37.407,38.792 v1(39.439,38.792) ; v1(45.789,12.503) 45.789,28.632 ; 49.25,62.45 53.477,58.223 62.75,58.223 ; J4.8 60.6,64.7 62.075,63.225 ; 65.474,56.95 v1(65.474,47.174) 68.014,47.174 69.284,45.904 69.284,36.76 ; v1(76.396,32.569) 73.475,32.569 69.284,36.76 ; 45.789,28.632 v1(47.059,29.902) 49.091,27.87 v1(58.743,27.87) 60.394,27.87 v1(64.585,32.061) 69.284,36.76
  Bottom Layer w1: 33.216,70.923 v1(33.216,78.924) 39.566,85.274 v1(42.487,85.274) ; v2(73.856,81.317) 75.864,83.325 78.8,83.325 79.725,82.4 79.725,67.375
  Bottom Layer w2: 46.5,68.95 47.125,68.95 47.125,71.575 48.25,72.7 59.25,72.7 64.063,67.888 64,67.825 64,66.45
  other v1: 84.2,57 72.205,57.715 70.935,65.208
  other v3: 72.398,61.264 72.398,62.064
NetC1_2: C1.2 U1.73 | length 4.3
  Top Layer w0.254: U1.73 62.546,46.439 62.554,46.431 63.411,46.431 64.049,45.793 64.075,45.793 64.7,45.168 C1.2
NetC2_2: C2.2 U1.49 | length 3.3
  Top Layer w0.254: C2.2 58.854,30.66 U1.49
NetC3_1: C3.1 J4.7 SW1.1 SW1.2 U1.14 | length 68.8
  Top Layer w0.254: SW1.2 SW1.1 26.305,42.384 26.878,42.957 26.878,43.025 27.027,43.174 C3.1 35.375,43.131 38.275,43.131 40.467,40.939 U1.14 52.127,40.939 v1(57.6,46.412) ; J4.7 59.71,67.24 62.5,64.45 62.5,58.805 v1(59.505,55.81)
  Bottom Layer w0.254: v1(57.6,46.412) 59.505,48.317 v1(59.505,55.81)
NetC13_2: C13.2 U3.5 | length 7
  Top Layer w0.254: C13.2@9.95,31.275 12.899,28.326 U3.5@12.899,25.518
NetDS1_1: DS1.1 R6.1 | length 3.1
  Top Layer w0.254: R6.1 79.27,34.382 DS1.1
NetDS2_1: DS2.1 R7.1 | length 3.2
  Top Layer w0.254: R7.1 82.365,33.619 DS2.1
NetDS3_1: DS3.1 R8.1 | length 3.3
  Top Layer w0.254: DS3.1 85.54,33.619 R8.1
NetF1_1: F1.1 F1.3 J1.2 | length 18.3
  Top Layer w1: v2(77.392,81.317) 81.368,81.317 F1.3 F1.1
NetH1_1: H1.1 R1.2 | length 5.7
  Top Layer w0.254: H1.1 54.998,81.78 56.015,81.78 R1.2
NetH1_2: H1.2 J1.5 U2.6 | length 41.7
  Top Layer w0.254: U2.6 48.329,76.638 v1(48.583,76.384)
  Bottom Layer w0.254: H1.2 49.726,77.527 v1(48.583,76.384) 48.71,76.257 61.918,76.257 65.21,79.549 v2(75.624,79.549)
NetH2_1: H2.1 U1.23 | length 22.2
  Top Layer w0.254: U1.23 45.777,36.416 47.276,36.416 47.44,36.252 48.698,36.252 48.75,36.304 v1(48.75,36.45)
  Bottom Layer w0.254: H2.1 33.617,31.7 41.5,31.7 46.25,36.45 v1(48.75,36.45)
NetH2_2: H2.2 U1.24 | length 15.2
  Top Layer w0.254: H2.2 42.36,30.41 43.63,31.68 43.63,35.109 44.46,35.939 U1.24
NetJ1_4: J1.4 R1.1 U2.7 | length 30.1
  Top Layer w0.254: U2.7 56.331,77.908 R1.1 56.964,77.781 v2(73.856,77.781)
NetJ2_1: J2.1 U1.45 | length 25.5
  Top Layer w0.254: U1.45 56.854,20.996 58.52,19.33 J2.1
NetJ2_2: J2.2 U1.43 | length 25.2
  Top Layer w0.254: U1.43 55.854,19.456 57.02,18.29 J2.2
NetJ2_3: J2.3 U1.41 | length 25.1
  Top Layer w0.254: U1.41 54.854,17.154 55.568,16.44 55.568,9.122 J2.3
NetJ2_4: J2.4 U1.39 | length 25
  Top Layer w0.254: U1.39 53.854,14.725 54.171,14.408 54.171,9.225 J2.4
NetJ2_5: J2.5 U1.97 | length 46.5
  Top Layer w0.254: U1.97 48.845,49.03 48.845,48.098 48.837,48.089 48.837,47.863 50.796,45.904 v1(51.123,45.904) ; v1(52.139,29.775) 52.139,28.632 52.52,28.251 J2.5
  Bottom Layer w0.254: v1(51.123,45.904) 52.546,45.904 57,41.45 57,34.636 v1(52.139,29.775)
NetJ2_6: J2.6 U1.1 | length 55.2
  Top Layer w0.254: v1(43.75,28.7) 42.5,27.45 42.5,22.2 51.02,13.68 J2.6 ; U1.1 47.761,47.439 51.5,43.7 v1(52.75,43.7)
  Bottom Layer w0.254: v1(43.75,28.7) 46.5,31.45 51,31.45 54.75,35.2 54.75,41.7 v1(52.75,43.7)
NetJ2_7: J2.7 U1.3 | length 53.4
  Top Layer w0.254: v1(41,28.45) 41,21.95 49.52,13.43 J2.7 ; U1.3 47.261,46.439 50.5,43.2 v1(50.5,42.95)
  Bottom Layer w0.254: v1(41,28.45) 45,32.45 50.5,32.45 53.5,35.45 53.5,39.95 v1(50.5,42.95)
NetJ2_8: J2.8 U1.5 | length 51.7
  Top Layer w0.254: v1(38.5,28.45) 38.5,22.45 48.02,12.93 J2.8 ; U1.5 47.011,45.439 48.25,44.2 v1@48.25,43.45
  Bottom Layer w0.254: v1@38.574,28.626 40.649,30.7 42,30.7 44.75,33.45 48.75,33.45 51.75,36.45 51.75,39.2 48.444,42.506 48.444,43.006 v1(48.25,43.2)
NetJ3_1: J3.1 R3.1 | length 4.4
  Top Layer w0.254: J3.1 25.321,12.989 R3.1
NetJ3_2: J3.2 U1.18 | length 53.9
  Top Layer w0.254: J3.2 23.821,9.446 23.9,9.525 v1(23.9,26.35) ; U1.18 47.511,38.939 48.5,37.95 v1(50.25,37.95)
  Bottom Layer w0.254: v1(23.9,26.35) 23.9,26.45 23.7,26.65 30.25,33.2 41.5,33.2 46.25,37.95 v1(50.25,37.95)
NetJ3_9: J3.9 J3.10 R4.1 U3.4 | length 30.9
  Top Layer w0.254: J3.10 11.821,11.2 ; U3.4 12.899,23.618 15.817,26.536 15.817,27.542 R4.1 16.708,27.542 17.875,26.375 17.875,23.451 11.821,17.397 11.821,11.2 ; J3.9 13.321,10.429 12.55,11.2 11.821,11.2
NetJ4_1: J4.1 U1.72 | length 32.9
  Top Layer w0.254: v1(55.199,54.425) 56.487,55.713 56.5,55.7 v1(56.5,59.95) ; v1(58,43.15) 58,44.55 59.389,45.939 U1.72
  Bottom Layer w0.254: J4.1 52.9,65.97 52.9,63.3 56.25,59.95 v1(56.5,59.95) ; v1(55.199,54.425) 55.199,46.019 58,43.218 v1(58,43.15)
NetJ4_3: J4.3 U1.76 | length 36.7
  Top Layer w0.254: J4.3 54.17,71.049 55.187,72.066 60.394,72.066 63.75,68.71 63.75,53.435 U1.76
NetJ4_5: J4.5 U1.89 | length 19.8
  Top Layer w0.254: U1.89 52.854,53.729 55.45,56.325 55.45,65.98 J4.5
NetL1_1: L1.1 U4.7 | length 3.9
  Top Layer w0.254: U4.7 73.979,61.914 74.817,62.752 L1.1
NetR2_2: R2.2 R3.2 U1.15 | length 45.8
  Top Layer w0.254: v1(25.25,31.45) 25.25,20.366 R2.2 25.596,20.02 R3.2 ; U1.15 48.511,40.439 48.75,40.2 v1(48.75,39.7)
  Bottom Layer w0.254: v1(25.25,31.45) 28.75,34.95 42,34.95 46.75,39.7 v1(48.75,39.7)
NetR4_2: R4.2 R5.1 U3.3 | length 11
  Top Layer w0.254: U3.3 10.224,21.526 10.829,20.921 11.079,20.921 R5.1@11.627,20.373 ; R5.1 R5.1@11.627,20.373 ; R4.2 16.16,24.642 15.737,24.219 15.737,23.927 12.731,20.921 12.175,20.921 R5.1@11.627,20.373
NetR6_2: R6.2 U1.55 | length 16
  Top Layer w0.254: U1.55 74.32,37.439 75.253,36.506 R6.2
NetR7_2: R7.2 U1.57 | length 21.8
  Top Layer w0.254: U1.57 75.662,38.439 76.603,39.38 R7.2
NetR8_2: R8.2 U1.59 | length 25.7
  Top Layer w0.254: U1.59 74.376,39.439 75.507,40.57 84.397,40.57 84.9,40.067 84.9,39.75 85.223,39.427 R8.2
NetR9_1: R9.1 U2.8 | length 3.4
  Top Layer w0.254: R9.1 cw(c43.63,81.913) 44.042,81.913 U2.8
NetU1_95: U1.95 U2.4 | length 32.8
  Top Layer w0.254: U2.4@38.5,75.45 36.5,73.45 36.5,68.7 45.4,59.8 v1(45.575,59.8) ; v1@49.5,53.95 49.5,51.2 49.854,50.846 U1.95
  Bottom Layer w0.254: v1(45.575,59.8) 45.575,59.875 49.5,55.95 v1(49.5,54.2)
NetU1_96: U1.96 U2.1 | length 48.3
  Top Layer w0.254: U2.1 38.392,80.058 37.25,81.2 31.75,81.2 30.75,80.2 30.75,70.7 v1(42.5,58.95) ; v1@47.25,53.95 47.25,52.7 49.354,50.596 U1.96
  Bottom Layer w0.254: v1(42.5,58.95) 42.75,58.95 v1(47.5,54.2)
VCC_MCU: C4.2 C5.2 C6.2 C7.2 C8.1 C9.1 C10.1 C11.2 C12.1 C15.2 J3.3 J3.4 J3.5 J4.2 L1.2 U1.6 U1.11 U1.19 U1.21 U1.22 U1.28 U1.50 U1.75 U1.100 U2.3 U3.1 U4.6 | length 348
  Top Layer w0.254: U3.1 10.317,25.425 10.925,25.425 11.75,24.6 11.725,24.575 v1(11.725,22.325) ; v1(20.77,11.868) v1@20.821,11.817 ; C12.1 33.406,76.638 U2.3 ; v1(38.169,45.523) v1@38.169,45.777 ; 40.306,52.276 40.306,52.359 ; C6.2 41.634,38.439 U1.19 ; C11.2 41.852,34.23 42.254,34.632 42.328,34.632 43.884,36.188 43.884,36.79 44.033,36.939 ; C5.2 42.106,43.734 42.508,43.332 42.582,43.332 43.475,42.439 44.675,42.439 U1.11 ; C4.2 42.551,46.856 44.468,44.939 U1.6 ; 43.884,55.937 44.011,55.81 ; C10.1 45.408,50.846 45.81,50.444 45.884,50.444 47.289,49.039 U1.100 ; U1.22 44.033,36.939 ; U1.21 44.533,37.439 44.033,36.939 ; U1.28 48.354,32.29 49.282,31.362 C7.2 ; U1.50@59.385,33.808 61.005,32.188 C8.1 ; U1.75 60.954,47.447 63.316,49.809 63.854,49.809 C9.1@63.965,49.92 ; C9.1@63.601,50.508 63.675,50.508 64.077,50.106 C9.1 ; U4.6 73.889,61.414 74.921,60.382 76.734,60.382 L1.2 ; C15.2 74.24,65.876 C15.2@74.588,66.224
  Top Layer w0.5: J3.5 19.321,10.419 v1(20.77,11.868) ; J3.4 20.821,11.817 22.321,10.317 J3.3 ; C12.1 33.343,74.857 v1(34.75,73.45) ; v1(38.5,73.45) 52.5,73.45 ; 40.306,52.359 41.471,53.524 ; C5.2 40.138,43.808 38.169,45.777 38.169,50.139 40.306,52.276 42.551,50.031 C4.2 ; v1(44,22.25) 45.63,22.25 v1(48.329,24.949) 49.282,25.902 C7.2 ; 44.011,55.81 49.61,55.81 51.63,57.83 J4.2 ; C10.1 44.075,50.92 41.471,53.524 ; v1(60.013,23.298) 67.633,23.298 71.697,27.362 ; C8.1 62.235,29.966 64.839,27.362 71.697,27.362 ; v1(63.696,73.971) 63.442,74.225 53.409,74.225 46.805,67.621 46.805,58.858 43.884,55.937 41.471,53.524 ; C9.1@63.965,49.92 69.459,49.92 72.967,46.412 ; v1(71.85,68.775) 74.24,66.385 C15.2@74.24,65.876 ; v1(73.983,35.109) 73.983,29.648 71.697,27.362 ; v1(73.983,42.221) 73.983,45.396 72.967,46.412 ; C15.2@74.237,64.954 78.301,64.954 79.825,63.43 79.825,61.525 78.852,60.552 L1.2 ; C15.2@74.588,66.224 80.841,66.224 81.222,65.843 81.222,54.667 72.967,46.412
  Bottom Layer w0.5: v1(20.77,11.868) 19.246,11.868 11.725,19.389 v1(11.725,22.325) 43.258,22.325 v1@43.458,22.125 ; v1(34.75,73.45) v1(38.5,73.45) ; v1(38.169,45.523) 38.169,42.602 v1@41.471,39.3 ; v1(48.329,24.949) 49.98,23.298 v1(60.013,23.298) ; v1(63.696,73.971) 67.125,73.971 71.95,69.146 71.85,69.046 v1(71.85,68.775) ; v1(73.983,35.109) v1(73.983,42.221)
  other v1: 41.725,39.173
pads on no net: J1.1 J2.11 J2.12 J3.11 J3.12 J4.4 J4.6 U1.2 U1.4 U1.7 U1.8 U1.9 U1.12 U1.13 U1.16 U1.17 U1.25 U1.26 U1.29 U1.30 U1.31 U1.32 U1.33 U1.34 U1.35 U1.36 U1.37 U1.38 U1.40 U1.42 U1.44 U1.46 U1.47 U1.48 U1.51 U1.52 U1.53 U1.54 U1.56 U1.58 U1.60 U1.61 U1.62 U1.63 U1.64 U1.65 U1.66 U1.67 U1.68 U1.69 U1.70 U1.71 U1.77 U1.78 U1.79 U1.80 U1.81 U1.82 U1.83 U1.84 U1.85 U1.86 U1.87 U1.88 U1.90 U1.91 U1.92 U1.93 U1.98 U2.5
copper on no net:
  other v2: 77.392,77.781

## Polygon pours and split planes (outlines as drawn)
GND on Bottom Layer "Bottom Layer-GND" (solid, pour order 6): 61.5,67.95 61.5,56.2 85,56.2 85,67.95
GND on Bottom Layer "Bottom Layer-GND 1" (solid, pour order 4): 14.525,72.425 49.25,72.425 49.25,60.75 39.087,60.75 25.193,33.45 5.2,33.45 5.2,63.1

## Silkscreen, mask and mechanical layers (free items; w line width, h text height)
Top Overlay:
  drawing of 75 lines, arcs and shapes, not listed
  text "SWO" at 57.125,69.275 h1.52 r90
  text "NRST" at 59.825,69.275 h1.52 r90
  text "SWDCLK" at 54.375,69.15 h1.52 r90
  text "SWDIO" at 51.75,69.125 h1.52 r90
  text "GND" at 60.2,58.675 h1.52 r90
  text "VCC" at 52.3,58.5 h1.52 r90
  text "12V" at 64.1,57.725 h1.52
  text "GND" at 81.95,53.75 h1.52
  text "Designed by Matty Hydoplane" at 14.935,53.493 h0.4
  text "11/26/19 Revision III" at 14.897,52.407 h0.4
  text "Andrew was here" at 15.3,51.475 h0.64
  text "UART TX" at 32.75,32.45 h0.9 r90
  text "UART RX" at 35.25,32.45 h0.9 r90